# Altium PCB PCB.PcbDoc
Units mm, origin at the board's own origin, x right, y up, seen from the top; angles counter-clockwise.
Board outline 91 x 78.5 mm, 2 copper layers (Top Layer, Bottom Layer); 44 components, 40 nets, 189 pads, 50 vias.
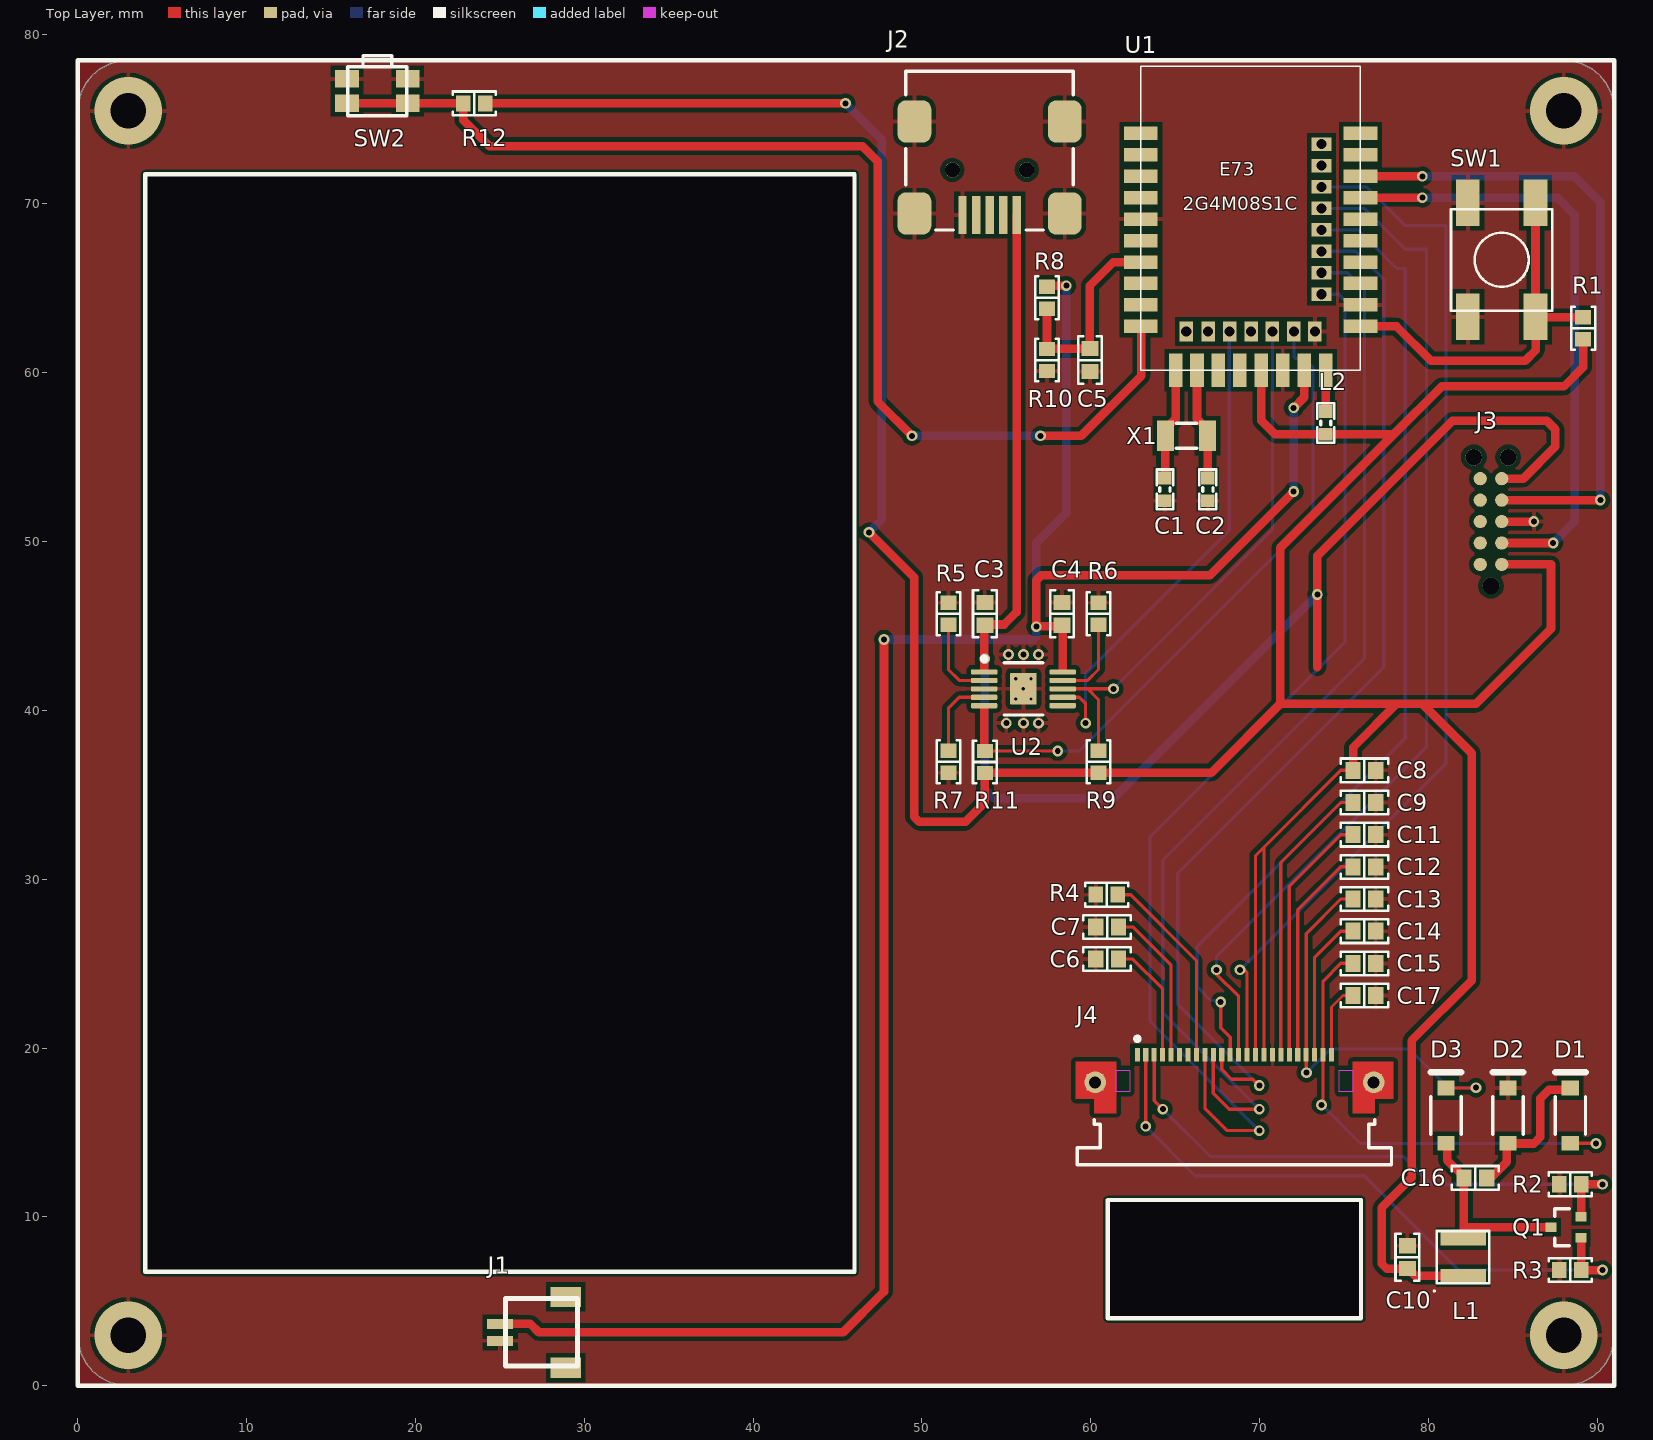
[diagram p0: Top Layer view]
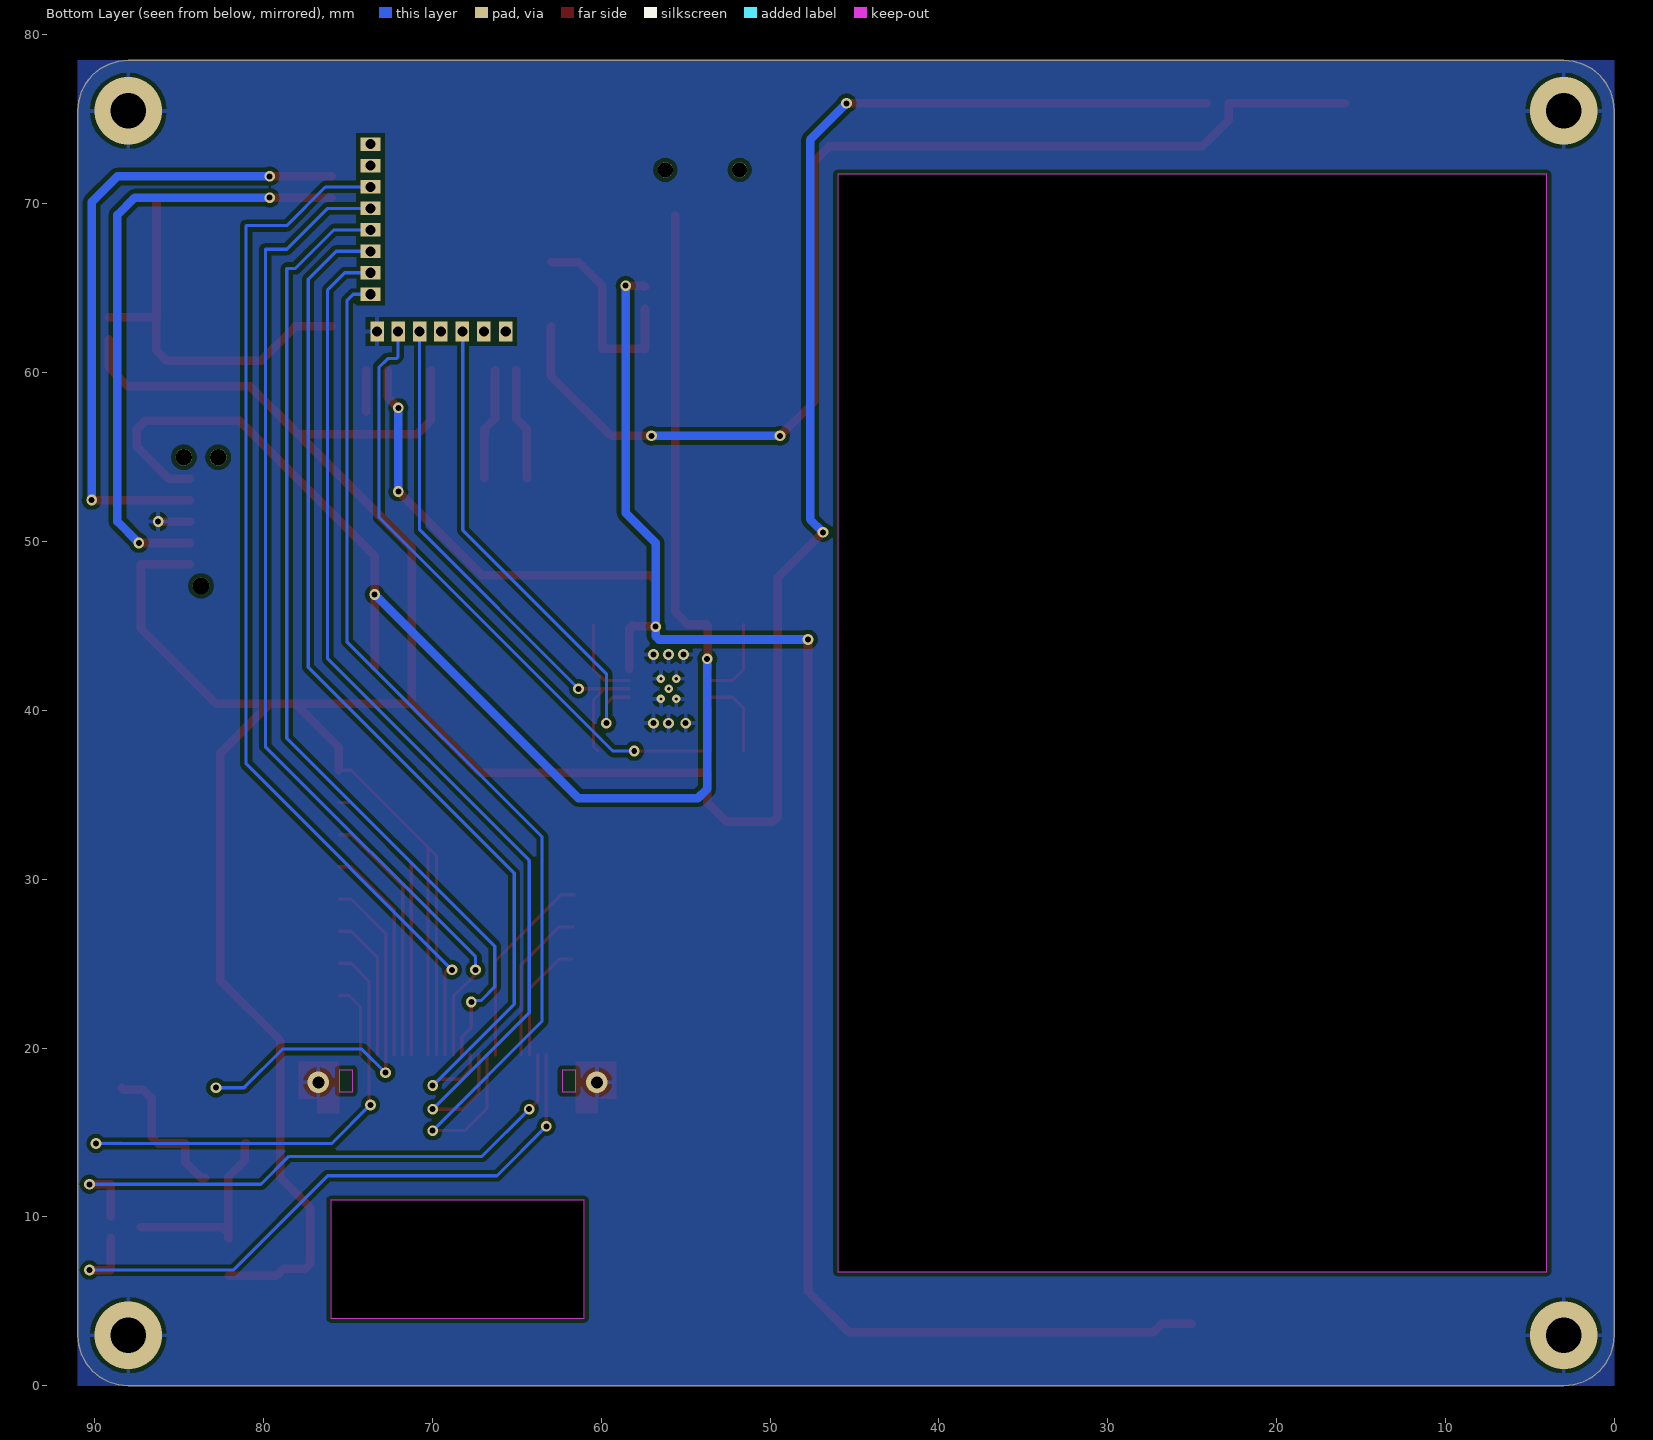
[diagram p1: Bottom Layer view, seen from below]
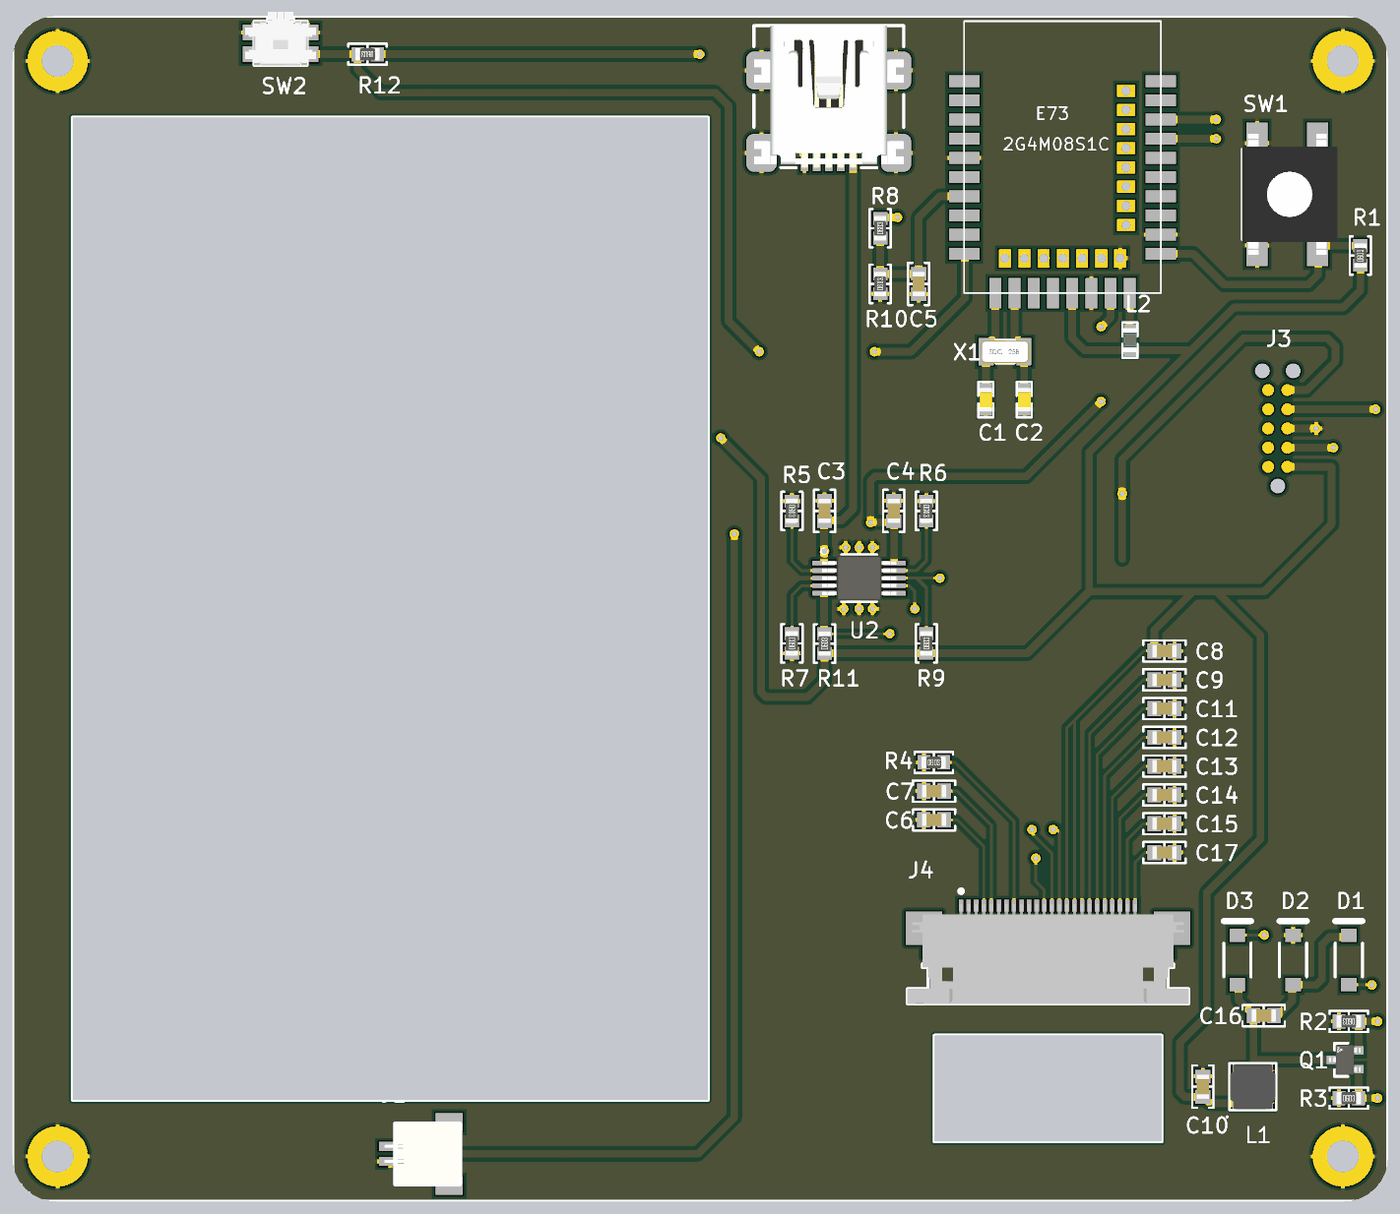
[diagram p2: 3D render of the assembled board from above, using the file's embedded part models]

## Layer stack, top to bottom
Top Solder: solder mask 0.0102, Solder Resist, Dk 3.5
Top Layer: signal copper 0.0356
Dielectric 1: dielectric 0.32, FR-4, Dk 4.8
Bottom Layer: signal copper 0.0356
Bottom Solder: solder mask 0.0102, Solder Resist, Dk 3.5

## Board outline
88,0 88.585,0.058 89.148,0.228 89.667,0.506 90.121,0.879 90.494,1.333 90.772,1.852 90.942,2.415 91,3 91,75.5 90.942,76.085 90.772,76.648 90.494,77.167 90.121,77.621 89.667,77.994 89.148,78.272 88.585,78.442 88,78.5 3,78.5 2.415,78.442 1.852,78.272 1.333,77.994 0.879,77.621 0.506,77.167 0.228,76.648 0.058,76.085 0,75.5 0,3 0.058,2.415 0.228,1.852 0.506,1.333 0.879,0.879 1.333,0.506 1.852,0.228 2.415,0.058 3,0
cut-out: 76,4 61,4 61,11 76,11
cut-out: 46,6.75 4,6.75 4,71.75 46,71.75

## Design rules (kind name [scope] priority, off if disabled: settings)
Clearance [All] p1: gap=0.254 ignorepadtopadclearanceinfootprint=FALSE except(0: Arc-Hole Track-Hole SMDPad-Hole THPad-Hole Via-Hole Fill-Hole Poly-Hole Region-Hole Text-Hole)
PolygonConnect [All] p1: connectstyle=Relief reliefconductorwidth=0.256 reliefentries=4 polygonreliefangle="90 Angle" airgapwidth=0.254
RoomDefinition Sheet1 [InComponentClass('Sheet1')] p1: confinementstyle=ConfineIn formatcopy=TRUE lockcomponents=FALSE outline 0,0 50.8,0 50.8,25.4 0,25.4
RoomDefinition Sheet [InComponentClass('Sheet')] p2: confinementstyle=ConfineIn formatcopy=TRUE lockcomponents=FALSE outline 0,0 50.8,0 50.8,25.4 0,25.4
RoutingVias [All] p1: holewidth=0.711 width=1.27 viastyle="Through Hole" minholewidth=0.355 minwidth=0.635 maxholewidth=0.711 maxwidth=1.27
SolderMaskExpansion [All] p1: expansion=0.102
Width [All] p1: maxlimit=0.508 minlimit=0.19 preferedwidth=0.254
30 further rules are at their usual default settings.

## Classes and differential pairs
component class Sheet1: C6 C7 C8 C9 C10 C11 C12 C13 C14 C15 C16 C17 D1 D2 D3 J4 L1 Q1 R2 R3 R4 R12 SW2
component class Sheet: C1 C2 C3 C4 C5 J1 J2 J3 L2 R1 R5 R6 R7 R8 R9 R10 R11 SW1 U1 U2 X1

## Components (designator, comment, footprint, x,y, rotation, side; value= is the part's Value field where it differs from the comment)
C1 "4.7µF" CAPC1608X06L 64.389,53.086 r90 top
C2 "4.7µF" CAPC1608X06L 66.929,53.086 r90 top
C3 "1µF" "CAP 0603_1608" 53.721,45.72 r270 top
C4 "1µF" "CAP 0603_1608" 58.293,45.72 r270 top
C5 "10000pF" "CAP 0603_1608" 59.944,60.746 r90 top
C6 "1µF" "CAP 0603_1608" 60.96,25.273 r0 top
C7 "1µF" "CAP 0603_1608" 60.96,27.178 r0 top
C8 "100nF" "CAP 0603_1608" 76.2,36.449 r180 top
C9 "1µF" "CAP 0603_1608" 76.2,34.544 r180 top
C10 "4.7µF" "CAP 0603_1608" 78.74,7.62 r270 top
C11 "1µF" "CAP 0603_1608" 76.2,32.639 r180 top
C12 "1µF" "CAP 0603_1608" 76.2,30.734 r180 top
C13 "1µF" "CAP 0603_1608" 76.2,28.829 r180 top
C14 "1µF" "CAP 0603_1608" 76.2,26.924 r180 top
C15 "1µF" "CAP 0603_1608" 76.2,25.019 r180 top
C16 "4.7µF" "CAP 0603_1608" 82.764,12.319 r180 top
C17 "1µF" "CAP 0603_1608" 76.2,23.114 r180 top
D1 "MBR0530" FAIR-SOD123-2_V 88.392,16.002 r90 top
D2 "MBR0530" FAIR-SOD123-2_V 84.709,16.002 r90 top
D3 "MBR0530" FAIR-SOD123-2_V 81.026,16.002 r90 top
J1 "HDR-2, 1mm" SM02B-SRSS-TB 25.019,3.167 r90 top
J2 "10033526-N3212LF" "FCI USB 10033526-N3212LF" 54,73.152 r0 top
J3 "TC2050-IDC" TC2050-IDC-NLFP 83.693,51.181 r90 top
J4 "52435-2471" MOLX-52435-2471 68.5,18.84 r0 top
L1 "2.2µH" TY-NR3015 82.042,7.62 r90 top
L2 "10µH" INDC1608X06L 73.914,57.023 r270 top
Q1 "SI1308EDL-T1-GE3" FP-S-03946-MFG 88.138,9.398 r180 top
R1 "10 kOhms" "RES 0603_1608" 89.154,62.626 r90 top
R2 "470 mOhms" "RES 0603_1608" 88.392,11.938 r180 top
R3 "10 kOhms" "RES 0603_1608" 88.392,6.858 r0 top
R4 "0 Ohms" "RES 0603_1608" 60.945,29.083 r0 top
R5 "1 kOhms" "RES 0603_1608" 51.562,45.72 r270 top
R6 "10 kOhms" "RES 0603_1608" 60.452,45.72 r270 top
R7 "2 kOhms" "RES 0603_1608" 51.562,36.957 r90 top
R8 "820 kOhms" "RES 0603_1608" 57.404,64.429 r90 top
R9 "10 kOhms" "RES 0603_1608" 60.452,36.957 r90 top
R10 "2 MOhms" "RES 0603_1608" 57.404,60.746 r90 top
R11 "10 kOhms" "RES 0603_1608" 53.721,36.942 r90 top
R12 "10 kOhms" "RES 0603_1608" 23.495,75.946 r180 top
SW1 "PB SW" Switch-PB-6.2x6.3mm-SMD 84.328,66.675 r270 top
SW2 "PTS840 GK SMTR LFS" EVQP7A/J/B/K 17.75,76.671 r180 top
U1 "E73-2G4M08S1C" E73-2G4M08S1C 62.976,60.154 r0 top
U2 "BQ24090DGQT" DGQ0010D_M 56.007,41.275 r0 top
X1 "32.768kHz" XTAL_3215 65.659,56.261 r0 top

## Footprints (in the part's own frame and the unit in brackets; to place one, negate y for a bottom-side part, rotate by r counter-clockwise, add the part's x,y. Pads: shape width x height; smd on the part's side, far side on the other; paste and mask are expansions set on the pad)
"CAP 0603_1608" [mm] "Chip Capacitor, 2-Leads, Body 1.60x0.80mm, IPC Medium Density"
  rect 0.9x1 smd: 1(-0.675,0) 2(0.675,0)
  silkscreen extent -1.4,-0.7 1.4,0.7, body extent -0.8,-0.41 0.8,0.41, height 0.82
CAPC1608X06L [mm]
  rect 0.75x0.8 smd: 1(-0.675,0) 2(0.675,0)
  silkscreen extent -1.17,-0.5 1.17,0.5, body extent -0.8,-0.43 0.8,0.43, height 0.8
DGQ0010D_M [mm] "TSOP, 10-Leads, Body 3.1x3.1mm, Pitch 0.5mm, Thermal Pad 1.88x1.57mm, IPC Low Density"
  rrect33% 1.55x0.3 smd: 1(-2.325,1) 2(-2.325,0.5) 3(-2.325,0) 4(-2.325,-0.5) 5(-2.325,-1) 6(2.325,-1) 7(2.325,-0.5) 8(2.325,0) 9(2.325,0.5) 10(2.325,1)
  rrect6% 1.57x1.88 smd: 11(0,0)
  silkscreen extent -2.45,-1.55 1.15,1.9, body extent -2.45,-1.5 2.45,1.5, height 0.94
E73-2G4M08S1C [mm]
  rect 2x0.8 smd: 1(-0.016,14.014) 2(-0.016,12.744) 3(-0.016,11.474) 4(-0.016,10.204) 5(-0.016,8.934) 6(-0.016,7.664) 7(-0.016,6.394) 8(-0.016,5.124) 9(-0.016,3.854) 10(-0.016,2.584) 26(12.984,2.584) 27(12.984,3.854) 29(12.984,5.124) 31(12.984,6.394) 33(12.984,7.664) 35(12.984,8.934) 37(12.984,10.204) 39(12.984,11.474) 41(12.984,12.744) 43(12.984,14.014)
  rect 0.8x2 smd: 11(2.039,-0.016) 13(3.309,-0.016) 15(4.579,-0.016) 17(5.849,-0.016) 19(7.119,-0.016) 21(8.389,-0.016) 23(9.659,-0.016) 25(10.929,-0.016)
  rect 0.8x1.2 hole 0.6: 12(2.674,2.284) 14(3.967,2.284) 16(5.237,2.284) 18(6.507,2.284) 20(7.777,2.284) 22(9.047,2.284) 24(10.294,2.284)
  rect 1.2x0.8 hole 0.6: 28(10.684,4.489) 30(10.684,5.759) 32(10.684,7.029) 34(10.684,8.299) 36(10.684,9.569) 38(10.684,10.839) 40(10.684,12.109) 42(10.684,13.379)
  silkscreen extent -0.02,-0.02 12.98,17.98
EVQP7A/J/B/K [mm]
  rect 1.4x1.05 smd: 1(-1.8,0.725) 1(1.8,0.725) 2(-1.8,-0.725) 2(1.8,-0.725)
  silkscreen extent -1.75,-2.1 1.75,1.45, body extent -2.35,-2.1 2.35,1.45, height 1.35
FAIR-SOD123-2_V [mm] "SOD123, 2-Leads, Body 1.80x2.85mm"
  rect 0.88x1.02 smd: 1(-1.635,0) 2(1.635,0)
  silkscreen extent -1.11,-0.9 2.58,0.9, body extent -1.43,-0.9 1.42,0.9, height 1.28
"FCI USB 10033526-N3212LF" [mm] "USB 2.0 Type B Mini"
  rect 0.5x2.25 smd: 1(1.6,-3.826) 2(0.8,-3.826) 3(0,-3.826) 4(-0.8,-3.826) 5(-1.6,-3.826)
  round 0.9 hole 0.9 unplated: M(-2.2,-1.151) M(2.2,-1.151)
  rrect50% 2x2.5 smd: S(-4.45,-3.731) S(-4.45,1.719) S(4.45,-3.731) S(4.45,1.719)
  silkscreen extent -4.95,-4.71 4.95,4.69, body extent -4.95,-4.7 4.95,4.7, height 4.01
FP-S-03946-MFG [mil]
  rect 26x22 smd paste+0 mask+0: 1(-35,24.5) 2(-35,-24.5) 3(35,0)
  silkscreen extent -7,-43 27,43, body extent -52,-47 52,47, height 10
INDC1608X06L [mm]
  rect 0.75x0.8 smd: 1(-0.675,0) 2(0.675,0)
  silkscreen extent -1.17,-0.5 1.17,0.5, body extent -0.8,-0.48 0.8,0.48, height 0.8
MOLX-52435-2471 [mm] "FPC Connector, 24-Leads, Right Angle, Pitch 0.5 mm, Mated Height 2.0 mm, SMT"
  rect 0.3x0.8 smd: 1(-5.75,0.762) 2(-5.25,0.762) 3(-4.75,0.762) 4(-4.25,0.762) 5(-3.75,0.762) 6(-3.25,0.762) 7(-2.75,0.762) 8(-2.25,0.762) 9(-1.75,0.762) 10(-1.25,0.762) 11(-0.75,0.762) 12(-0.25,0.762) 13(0.25,0.762) 14(0.75,0.762) 15(1.25,0.762) 16(1.75,0.762) 17(2.25,0.762) 18(2.75,0.762) 19(3.25,0.762) 20(3.75,0.762) 21(4.25,0.762) 22(4.75,0.762) 23(5.25,0.762) 24(5.75,0.762)
  rect 1x1 smd: MP1(-8.25,-0.863) MP2(8.25,-0.863)
  Top Layer region: -7,0.362 -9.4,0.362 -9.4,-1.838 -8.3,-1.838 -8.3,-2.688 -7,-2.688
  Top Layer region: 7,0.362 9.4,0.362 9.4,-1.838 8.3,-1.838 8.3,-2.688 7,-2.688
  Keep-Out Layer region: -7,-0.137 -6.2,-0.137 -6.2,-1.438 -7,-1.438
  Keep-Out Layer region: 6.2,-0.137 7,-0.137 7,-1.438 6.2,-1.438
  silkscreen extent -9.3,-5.74 9.3,1.84, body extent -9.3,-5.74 9.3,0.86, height 2.05
"RES 0603_1608" [mm] "Chip Resistor, 2-Leads, Body 1.60x0.80mm, IPC Medium Density"
  rect 0.85x0.95 smd: 1(-0.65,0) 2(0.65,0)
  silkscreen extent -1.27,-0.7 1.27,0.7, body extent -0.8,-0.4 0.8,0.4, height 0.45
SM02B-SRSS-TB [mm]
  rect 1.2x1.8 smd: 0(-2.1,-3.875) 0(2.1,-3.875)
  rect 0.6x1.55 smd: 1(-0.5,0) 2(0.5,0)
  silkscreen extent -2,-4.57 2,-0.33, body extent -1.99,-4.58 1.99,0.41, height 3
Switch-PB-6.2x6.3mm-SMD [mm]
  rect 2.75x1.4 smd: 1(-3.375,2) 1(3.375,2) 2(-3.375,-2) 2(3.375,-2)
  silkscreen extent -3,-3 3,3, body extent -4,-3 4,3.3, height 3.1
TC2050-IDC-NLFP [mil]
  round 39 hole 39 unplated: 0(-150,0) 0(150,-40) 0(150,40)
  round 31 smd paste-196.85: 1(-100,-25) 2(-50,-25) 3(0,-25) 4(50,-25) 5(100,-25) 6(100,25) 7(50,25) 8(0,25) 9(-50,25) 10(-100,25)
  Top Layer pour cut-out: -100,25 -100,-25 100,-25 100,25
TY-NR3015 [mm]
  rect 0.8x2.7 smd: 1(-1.1,0) 2(1.1,0)
  silkscreen extent -2.05,-1.55 1.55,1.75, body extent -1.5,-1.5 1.5,1.5, height 1.35
XTAL_3215 [mm]
  rect 1x1.8 smd: 1(-1.25,0) 2(1.25,0)
  silkscreen extent -0.6,-0.75 0.6,0.75, body extent -1.6,-0.75 1.6,0.75, height 0.81

## Part data
C1 C2: library part CAP_0603, "Capacitor, X7R, ±10%", Manufacturer=Samsung, Manufacturer Part Number=CL10B475KQ8NQNC, Part Number=C0603-4µ7-6.3V-X7R, Supplier part number=1276-2087-1-ND, Artikkelnr Noca=20039473, Artikkelnr Simpro=N.A., Datasheet=http://media.digikey.com/pdf/Data%20Sheets/Samsung%20PDFs/CL10B475KQ8NQNC_Spec.pdf, Footprint Doc=0603, LatestRevisionDate=2015-06-10, Note=6.3V, Pin Count=2, Published=2015-06-10, Publisher="Nordic Semiconductor", Supplier=Digi-Key
C3 C4: library part JMK107BJ105KK-T, "CAP CER 1UF 6.3V X5R 0603", Device Package="0603 (1608 Metric)", Manufacturer="Taiyo Yuden", Operating Temperature="-55°C ~ 85°C", Supplier Part Number 1=587-1993-1-ND, Temperature Coefficient=X5R, Tolerance=±10%, Voltage - Rated=6.3V, Applications="General Purpose", Capacitance=1µF, ComponentLink1Description=Datasheet, ComponentLink1URL=https://www.yuden.co.jp/productdata/catalog/mlcc01_e.pdf, ComponentLink2Description="DigiKey Link", ComponentLink2URL=http://digikey.com/product-detail/en/taiyo-yuden/JMK107BJ105KK-T/587-1993-1-ND/1646655, LastUpdated="21/01/2020 00:02:08", Lifecycle Status=Active, Minimum Order=1, Mounting Type="Surface Mount, MLCC", Package / Case="0603 (1608 Metric)", Packaging=TapeAndReel, PartId=2858, Part Number=JMK107BJ105KK-T, Part Status=Active, Price=0.02, Series=M, Size / Dimension="0.063\" L x 0.031\" W (1.60mm x 0.80mm)", Supplier 1=DigiKey, Thickness (Max)="0.020\" (0.50mm)"
C5: library part C0603C103K4RECAUTO, "CAP CER 0603 10NF 16V X7R 10%", Device Package="0603 (1608 Metric)", Manufacturer=KEMET, Operating Temperature="-55°C ~ 125°C", Ratings=AEC-Q200, Supplier Part Number 1=399-17880-1-ND, Temperature Coefficient=X7R, Tolerance=±10%, Voltage - Rated=16V, Applications="Automotive, ESD Protection", Capacitance=10000pF, ComponentLink1Description=Datasheet, ComponentLink1URL=https://api.kemet.com/component-edge/download/datasheet/C0603C103K4RECAUTO.pdf, ComponentLink2Description="DigiKey Link", ComponentLink2URL=http://digikey.com/product-detail/en/kemet/C0603C103K4RECAUTO/399-17880-1-ND/8640547, LastUpdated="21/01/2020 00:02:00", Lifecycle Status=Active, Minimum Order=1, Mounting Type="Surface Mount, MLCC", Package / Case="0603 (1608 Metric)", Packaging=TapeAndReel, PartId=8251, Part Number=C0603C103K4RECAUTO, Part Status=Active, Price=0.02, Series="ESD SMD Auto X7R", Size / Dimension="0.063\" L x 0.031\" W (1.60mm x 0.80mm)", Supplier 1=DigiKey, Thickness (Max)="0.034\" (0.87mm)"
C6 C7 C9 C11 C12 C13 C14 C15 C17: library part C0603C105K7PAC7867, "CAP CER 1UF 4V X5R 0603", Device Package="0603 (1608 Metric)", Manufacturer=KEMET, Operating Temperature="-55°C ~ 85°C", Supplier Part Number 1=399-14942-1-ND, Temperature Coefficient=X5R, Tolerance=±10%, Voltage - Rated=4V, Applications="General Purpose", Capacitance=1µF, ComponentLink1Description=Datasheet, ComponentLink1URL=https://api.kemet.com/component-edge/download/datasheet/C0603C105K7PAC7867.pdf, ComponentLink2Description="DigiKey Link", ComponentLink2URL=http://digikey.com/product-detail/en/kemet/C0603C105K7PAC7867/399-14942-1-ND/7382491, LastUpdated="21/01/2020 00:01:35", Lifecycle Status=Active, Minimum Order=1, Mounting Type="Surface Mount, MLCC", Package / Case="0603 (1608 Metric)", Packaging=TapeAndReel, PartId=18572, Part Number=C0603C105K7PAC7867, Part Status=Active, Price=0.03, Series="SMD Comm X5R", Size / Dimension="0.063\" L x 0.031\" W (1.60mm x 0.80mm)", Supplier 1=DigiKey, Thickness (Max)="0.035\" (0.90mm)"
C8: library part C0603C105K7PAC7867, "CAP CER 100nF 4V X5R 0603", Capacitance=1µF, Device Package="0603 (1608 Metric)", Manufacturer=KEMET, Operating Temperature="-55°C ~ 85°C", Supplier Part Number 1=399-14942-1-ND, Temperature Coefficient=X5R, Tolerance=±10%, Voltage - Rated=4V, Applications="General Purpose", ComponentLink1Description=Datasheet, ComponentLink1URL=https://api.kemet.com/component-edge/download/datasheet/C0603C105K7PAC7867.pdf, ComponentLink2Description="DigiKey Link", ComponentLink2URL=http://digikey.com/product-detail/en/kemet/C0603C105K7PAC7867/399-14942-1-ND/7382491, LastUpdated="21/01/2020 00:01:35", Lifecycle Status=Active, Minimum Order=1, Mounting Type="Surface Mount, MLCC", Package / Case="0603 (1608 Metric)", Packaging=TapeAndReel, PartId=18572, Part Number=C0603C105K7PAC7867, Part Status=Active, Price=0.03, Series="SMD Comm X5R", Size / Dimension="0.063\" L x 0.031\" W (1.60mm x 0.80mm)", Supplier 1=DigiKey, Thickness (Max)="0.035\" (0.90mm)"
C10 C16: library part LMK107BJ475KA-T, "CAP CER 4.7UF 10V X5R 0603", Device Package="0603 (1608 Metric)", Manufacturer="Taiyo Yuden", Operating Temperature="-55°C ~ 85°C", Supplier Part Number 1=587-1441-1-ND, Temperature Coefficient=X5R, Tolerance=±10%, Voltage - Rated=10V, Applications="General Purpose", Capacitance=4.7µF, ComponentLink1Description=Datasheet, ComponentLink1URL="https://ds.yuden.co.jp/TYCOMPAS/ut/detail?pn=LMK107BJ475KA-T  &u=M", ComponentLink2Description="DigiKey Link", ComponentLink2URL=http://digikey.com/product-detail/en/taiyo-yuden/LMK107BJ475KA-T/587-1441-1-ND/1004072, LastUpdated="21/01/2020 00:02:09", Lifecycle Status=Active, Minimum Order=1, Mounting Type="Surface Mount, MLCC", Package / Case="0603 (1608 Metric)", Packaging=TapeAndReel, PartId=2244, Part Number=LMK107BJ475KA-T, Part Status=Active, Price=0.03, Series=M, Size / Dimension="0.063\" L x 0.031\" W (1.60mm x 0.80mm)", Supplier 1=DigiKey, Thickness (Max)="0.035\" (0.90mm)"
D1 D2 D3: library part CMP-2000-05113-1, "Diode Schottky 30V 0.5A 2-Pin SOD-123 T/R", Capacitance @ Vr, F=-, Current - Average Rectified (Io)=500mA, Current - Reverse Leakage @ Vr=130µA@30V, Manufacturer=Fairchild, Operating Temperature - Junction=-65degC~125degC, Package / Case=SOD-123, Standard Package=1, Voltage - DC Reverse (Vr) (Max)=30V, Voltage - Forward (Vf) (Max) @ If=430mV@500mA, Category=DiscreteSemiconductorProducts, Datasheet URL=https://www.fairchildsemi.com/datasheets/MB/MBR0530.pdf, Datasheet Version="Rev. 1.1.0, 10/2014", Diode Type=Schottky, Family=Diodes,Rectifiers-Single, Manufacturer URL=https://www.fairchildsemi.com/, Mounting Type=SurfaceMount, Online Catalog=SchottkyDiode, Other Names=MBR0530CT, Packaging=CutTape(CT), Reverse Recovery Time (trr)=-, Series=-, Speed=FastRecovery=200mA(Io), Supplier Device Package=SOD-123
J1: library part SM02B-SRSS-TB, "1.0mm pitch connector side entry SMD", Manufacturer=JST, Manufacturer Part Number=SM02B-SRSS-TB(LF)(SN), Part number IPS=00000007791, Supplier part number=455-1802-1-ND, Artikkelnr Noca=55010030, Artikkelnr Simpro=N.A., Datasheet=http://www.jst-mfg.com/product/pdf/eng/eSH.pdf, Footprint Doc=SM02B-SRSS-TB, LatestRevisionDate=2016-06-20, Note="JST, Header", Part Number=SM02B-SRSS-TB, Pin Count=2, Published=2016-06-20, Publisher="Nordic Semiconductor", Supplier=Digi-Key
J2: "CONN RCPT MINI USB B 5POS SMD RA", Current Rating (Amps)="1A per Contact", Manufacturer="Amphenol ICC (FCI)", Operating Temperature="-25°C ~ 85°C", Supplier Part Number 1=609-4700-2-ND, Voltage - Rated=30V, ComponentLink1Description=Datasheet, ComponentLink1URL=http://www.amphenol-icc.com/media/wysiwyg/files/drawing/10033526.pdf, ComponentLink2Description="DigiKey Link", ComponentLink2URL=//digikey.com/product-detail/en/amphenol-icc-fci/10033526-N3212LF/609-4700-2-ND/4292074, Connector Type="USB - mini B", Features="Board Guide, Solder Retention", Gender=Receptacle, LastUpdated="09/12/2019 20:52:14", Lifecycle Status=0, Mating Cycles=5000, Minimum Order=1, Mounting Feature=Horizontal, Mounting Type="Surface Mount, Right Angle", Number of Contacts=5, Number of Ports=1, Packaging=TapeAndReel, Part Number=10033526-N3212LF, Part Status=Active, Price=0.39, Series=-, Shielding=Shielded, Supplier 1=DigiKey, Termination=Solder
J3: "CBL PLUG-OF-NAILS 10-PIN", Manufacturer="Tag-Connect LLC", Manufacturer Part Number=TC2050-IDC-NLFP, Supplier part number=TC2050-IDC-NL-ND, Artikkelnr Noca=N.A., Artikkelnr Simpro=N.A., ComponentLink1Description=Datasheet, ComponentLink2Description="Supplier link", Footprint Doc=TC2050-IDC-NLFP, HelpURL=http://www.tag-connect.com/Materials/TC2050-IDC%20Datasheet.pdf, LatestRevisionDate=2012-11-21, Part Number=TC2050-IDC-NLFP, Pin Count=10, Published=2012-11-21, Publisher="Nordic Semiconductor", Supplier=Digi-Key
J4: library part CMP-1241-00275-1, "0.5 mm Pitch Easy-On(TM) Type FPC Connector, 2.0 mm Mated Height, Right Angle, ZIF, SMT, Top Contact, 24 Circuits, -40 to 85 degC, ELV and RoHS Compliant, Tape and Reel", Current (Max per Contact)=0.5A, Manufacturer=Molex, Voltage (Max)="50V AC (RMS)/DC", Circuits (Loaded)=24, ComponentLink1Description="Manufacturer URL", ComponentLink1URL=http://www.molex.com/molex/index.jsp, ComponentLink2Description=Datasheet, ComponentLink2URL=http://www.molex.com/webdocs/datasheets/pdf/en-us/0524352471_FFC_FPC_CONNECTORS.pdf, ComponentLink3Description="Package Specification", ComponentLink3URL=http://www.molex.com/pdm_docs/sd/524352471_sd.pdf, Contact Position=Top, Durability (mating cycles max)=20, Entry Angle="90degrees Angle", Mated Height=2.00mm, Material - Metal="Phosphor Bronze", Material - Plating Mating=Gold, Material - Plating Termination=Gold, Mounting Technology="Surface Mount", Number of Rows=1, Orientation="Right Angle", PackageDescription="24-Lead FPC Connector, Pitch 0.5 mm", PackageReference=52435-2471, PackageVersion="Rev. D, 07/2010", Packing="Tape and Reel", PartNumber=52435-2471, PCB Locator=No, PCB Retention=Yes, Pitch - Mating Interface=0.50mm, Polarized to PCB=Yes, RoHS=TRUE, Stackable=No
L1: library part IND_1212, "Ferrite Inductor, Shielded, 1,5A, 72mOhm", 2nd source part number=188-5853, Manufacturer="Taiyo Yuden", Manufacturer Part Number=NR3015T2R2M, Part Number=NR3015-2µ2-1.5A-72mOhm, Supplier part number=587-1648-1-ND, 2nd source Supplier=Farnell, Artikkelnr Noca=33029487, Artikkelnr Simpro=N.A., ComponentLink1Description=Datasheet, ComponentLink2Description="Supplier link", Datasheet=http://www.yuden.co.jp/ut/product/category/inductor/NR3015T2R2M.pdf, Footprint Doc=1212, LatestRevisionDate=2014-01-22, Pin Count=2, Published=2014-01-22, Publisher="Nordic Semiconductor", Supplier=Digi-Key
L2: library part IND_0603, "Inductor, 80mA, ±10%", 2nd source part number=178-6105, Manufacturer="Taiyo Yuden", Manufacturer Part Number=LBMF1608T100K, Part Number=L0603-10µ, Part number IPS=00000007794, Supplier part number=587-1714-1-ND, 2nd source Supplier=Farnell, Artikkelnr Noca=33029314, Artikkelnr Simpro=N.A., ComponentLink1Description=Datasheet, ComponentLink2Description="Supplier link", Footprint Doc=0603, HelpURL=http://www.yuden.co.jp/ut/product/pdf/elb2_e.pdf, LatestRevisionDate=2012-09-19, Note="LBMF1608T100K 10µH 80mA 0603", Pin Count=2, Published=2010-02-24, Publisher="Nordic Semiconductor", Supplier=Digi-Key
Q1: library part CMP-02550-000099-1, "MOSFET N-CH 30V 1.4A SC-70-3", Continuous Drain Current=1.5A, Drain To Source Breakdown Voltage=30V, Drain To Source Resistance=0.11O, Gate To Source Voltage=12V, Input Capacitace At Vds="105pF @ 15V", Manufacturer=Vishay, Max Forward Diode Voltage=1.2V, Max Junction Temp=+150°C, Package=S-03946, Power Dissipation=0.4W, Pulse Drain Current=6A, Temperature="-55°C to +150°C", Temperature Range Low=-55°C, Typ Forward Diode Voltage=0.8V, Automotive=No, Category=Trans, ComponentLink2Description=Datasheet, ComponentLink2URL=http://www.vishay.com/docs/63399/si1308edl.pdf, Depletion Mode=False, Device Class L1="Discrete Semiconductors", Device Class L2=Transistors, Device Class L3=MOSFETs, Digikey Description="MOSFET N-CH 30V 1.4A SC-70-3", Drain To Source Voltage=30V, Gate Charge At Vgs="2.7nC @ 10V", Height=1.1mm, Ipc Land Pattern Name=SOT65P210X100-3, Lead Free=Yes, Manufacturer Part Number=SI1308EDL-T1-GE3, Mouser Description="MOSFET 30V 1.5A", Number Of Channels=1, Number Of N Channels=1, Octopart=https://octopart.com/si1308edl-t1-ge3-vishay-45284459, Reverse Recovery Charge=3nC, Reverse Recovery Time=8ns, RoHS=TRUE, Rthja Max=250°C/W, Temperature Range High=+150°C, Threshold Vgs Max=1.5V, Threshold Vgs Min=0.6V, Transconductance=5S, Turn Off Delay Time=8ns, Turn On Delay Time=2ns
R1 R3 R6 R9 R11 R12: library part RNCS0603BKE10K0, "RES 10K OHM 0.1% 1/16W 0603", Device Package="0603 (1608 Metric)", Manufacturer="Stackpole Electronics Inc", Operating Temperature="-55°C ~ 155°C", Power (Watts)="0.063W, 1/16W", Ratings=AEC-Q200, Supplier Device Package=0603, Supplier Part Number 1=RNCS0603BKE10K0CT-ND, Temperature Coefficient=±25ppm/°C, Tolerance=±0.1%, ComponentLink1Description=Datasheet, ComponentLink1URL=https://www.seielect.com/catalog/sei-rncs_rnch.pdf, ComponentLink2Description="DigiKey Link", ComponentLink2URL=http://digikey.com/product-detail/en/stackpole-electronics-inc/RNCS0603BKE10K0/RNCS0603BKE10K0CT-ND/1800113, Composition="Thin Film", Features="Anti-Corrosive, Automotive AEC-Q200, Moisture Resistant", Height - Seated (Max)="0.022\" (0.55mm)", LastUpdated="21/01/2020 00:25:01", Lifecycle Status=Active, Minimum Order=1, Number of Terminations=2, Package / Case="0603 (1608 Metric)", Packaging=TapeAndReel, PartId=4838, Part Number=RNCS0603BKE10K0, Part Status=Active, Price=0.08, Resistance="10 kOhms", Series=RNCS, Size / Dimension="0.061\" L x 0.031\" W (1.55mm x 0.80mm)", Supplier 1=DigiKey
R2: library part RCWE0603R470FKEA, "RES 0.47 OHM 1% 1/5W 0603", Device Package="0603 (1608 Metric)", Manufacturer="Vishay Dale", Operating Temperature="-55°C ~ 155°C", Power (Watts)="0.2W, 1/5W", Ratings=AEC-Q200, Supplier Device Package=0603, Supplier Part Number 1=RCWE.47CCT-ND, Temperature Coefficient=±100ppm/°C, Tolerance=±1%, ComponentLink1Description=Datasheet, ComponentLink1URL=http://www.vishay.com/docs/20019/rcwe.pdf, ComponentLink2Description="DigiKey Link", ComponentLink2URL=http://digikey.com/product-detail/en/vishay-dale/RCWE0603R470FKEA/RCWE.47CCT-ND/2276694, Composition="Thick Film", Features="Automotive AEC-Q200, Current Sense, Moisture Resistant", Height - Seated (Max)="0.024\" (0.60mm)", LastUpdated="21/01/2020 00:22:42", Lifecycle Status=Active, Minimum Order=1, Number of Terminations=2, Package / Case="0603 (1608 Metric)", Packaging=TapeAndReel, PartId=10575, Part Number=RCWE0603R470FKEA, Part Status=Active, Price=0.17, Resistance="470 mOhms", Series=RCWE, Size / Dimension="0.063\" L x 0.033\" W (1.60mm x 0.85mm)", Supplier 1=DigiKey
R4: library part CRCW06030000Z0EAHP, "RES SMD 0 OHM JUMPER 1/4W 0603", Device Package="0603 (1608 Metric)", Manufacturer="Vishay Dale", Operating Temperature="-55°C ~ 155°C", Power (Watts)="0.25W, 1/4W", Ratings=AEC-Q200, Supplier Device Package=0603, Supplier Part Number 1=541-0.0SBCT-ND, Tolerance=Jumper, ComponentLink1Description=Datasheet, ComponentLink1URL=http://www.vishay.com/docs/20043/crcwhpe3.pdf, ComponentLink2Description="DigiKey Link", ComponentLink2URL=http://digikey.com/product-detail/en/vishay-dale/CRCW06030000Z0EAHP/541-0.0SBCT-ND/2222749, Composition="Thick Film", Features="Automotive AEC-Q200, Pulse Withstanding", Height - Seated (Max)="0.022\" (0.55mm)", LastUpdated="21/01/2020 00:24:44", Lifecycle Status=Active, Minimum Order=1, Number of Terminations=2, Package / Case="0603 (1608 Metric)", Packaging=TapeAndReel, PartId=5474, Part Number=CRCW06030000Z0EAHP, Part Status=Active, Price=0.02, Resistance="0 Ohms", Series=CRCW-HP, Size / Dimension="0.063\" L x 0.033\" W (1.60mm x 0.85mm)", Supplier 1=DigiKey
R5: library part CPF0603B1K0E, "RES SMD 1K OHM 0.1% 1/16W 0603", Device Package="0603 (1608 Metric)", Manufacturer="TE Connectivity Passive Product", Operating Temperature="-55°C ~ 155°C", Power (Watts)="0.063W, 1/16W", Supplier Device Package=0603, Supplier Part Number 1=A119887CT-ND, Temperature Coefficient=±25ppm/°C, Tolerance=±0.1%, ComponentLink1Description=Datasheet, ComponentLink1URL=https://www.te.com/commerce/DocumentDelivery/DDEController?Action=srchrtrv&DocNm=1773200&DocType=DS&DocLang=English, ComponentLink2Description="DigiKey Link", ComponentLink2URL=http://digikey.com/product-detail/en/te-connectivity-passive-product/CPF0603B1K0E/A119887CT-ND/4966485, Composition="Thin Film", Height - Seated (Max)="0.022\" (0.55mm)", LastUpdated="21/01/2020 00:24:55", Lifecycle Status=Active, Minimum Order=1, Number of Terminations=2, Package / Case="0603 (1608 Metric)", Packaging=TapeAndReel, PartId=4877, Part Number=CPF0603B1K0E, Part Status=Active, Price=0.09, Resistance="1 kOhms", Series="CPF, Neohm", Size / Dimension="0.061\" L x 0.031\" W (1.55mm x 0.80mm)", Supplier 1=DigiKey
R7: library part RT0603BRD072KL, "RES SMD 2K OHM 0.1% 1/10W 0603", Device Package="0603 (1608 Metric)", Manufacturer=Yageo, Operating Temperature="-55°C ~ 155°C", Power (Watts)="0.1W, 1/10W", Supplier Device Package=0603, Supplier Part Number 1=YAG1626CT-ND, Temperature Coefficient=±25ppm/°C, Tolerance=±0.1%, ComponentLink1Description=Datasheet, ComponentLink1URL=https://www.yageo.com/upload/media/product/productsearch/datasheet/rchip/PYu-RT_1-to-0.01_RoHS_L_11.pdf, ComponentLink2Description="DigiKey Link", ComponentLink2URL=http://digikey.com/product-detail/en/yageo/RT0603BRD072KL/YAG1626CT-ND/5139074, Composition="Thin Film", Height - Seated (Max)="0.022\" (0.55mm)", LastUpdated="21/01/2020 00:24:44", Lifecycle Status=Active, Minimum Order=1, Number of Terminations=2, Package / Case="0603 (1608 Metric)", Packaging=TapeAndReel, PartId=5635, Part Number=RT0603BRD072KL, Part Status=Active, Price=0.04, Resistance="2 kOhms", Series=RT, Size / Dimension="0.063\" L x 0.031\" W (1.60mm x 0.80mm)", Supplier 1=DigiKey
R8: library part CRGP0603F820K, "CRGP 0603 820K 1%", Device Package="0603 (1608 Metric)", Manufacturer="TE Connectivity Passive Product", Operating Temperature="-55°C ~ 155°C", Power (Watts)="0.25W, 1/4W", Supplier Device Package=0603, Supplier Part Number 1=A130451CT-ND, Temperature Coefficient=±100ppm/°C, Tolerance=±1%, ComponentLink1Description=Datasheet, ComponentLink1URL=https://www.te.com/commerce/DocumentDelivery/DDEController?Action=srchrtrv&DocNm=9-1773463-9&DocType=DS&DocLang=English, ComponentLink2Description="DigiKey Link", ComponentLink2URL=http://digikey.com/product-detail/en/te-connectivity-passive-product/CRGP0603F820K/A130451CT-ND/8578283, Composition="Thick Film", Features="Pulse Withstanding", Height - Seated (Max)="0.022\" (0.55mm)", LastUpdated="21/01/2020 00:24:55", Lifecycle Status=Active, Minimum Order=1, Number of Terminations=2, Package / Case="0603 (1608 Metric)", Packaging=TapeAndReel, PartId=5029, Part Number=CRGP0603F820K, Part Status=Active, Price=0.02, Resistance="820 kOhms", Series=CRGP, Size / Dimension="0.063\" L x 0.031\" W (1.60mm x 0.80mm)", Supplier 1=DigiKey
R10: library part RMCF0603FT2M00, "RES 2M OHM 1% 1/10W 0603", Device Package="0603 (1608 Metric)", Manufacturer="Stackpole Electronics Inc", Operating Temperature="-55°C ~ 155°C", Power (Watts)="0.1W, 1/10W", Ratings=AEC-Q200, Supplier Device Package=0603, Supplier Part Number 1=RMCF0603FT2M00CT-ND, Temperature Coefficient=±200ppm/°C, Tolerance=±1%, ComponentLink1Description=Datasheet, ComponentLink1URL=https://www.seielect.com/catalog/sei-rmcf_rmcp.pdf, ComponentLink2Description="DigiKey Link", ComponentLink2URL=http://digikey.com/product-detail/en/stackpole-electronics-inc/RMCF0603FT2M00/RMCF0603FT2M00CT-ND/1943145, Composition="Thick Film", Features="Automotive AEC-Q200", Height - Seated (Max)="0.022\" (0.55mm)", LastUpdated="21/01/2020 00:24:27", Lifecycle Status=Active, Minimum Order=1, Number of Terminations=2, Package / Case="0603 (1608 Metric)", Packaging=CutTape, PartId=6213, Part Number=RMCF0603FT2M00, Part Status=Active, Price=0.10, Resistance="2 MOhms", Series=RMCF, Size / Dimension="0.061\" L x 0.031\" W (1.55mm x 0.80mm)", Supplier 1=DigiKey
SW1: library part Switch-PB-6.2x6.3mm-SMD, "Tactile Switch, SPNO, SMD, 160gf, 6.2x6.3x2.5mm", 2nd source part number=688-SKHUALE010, Manufacturer=Dailywell, Manufacturer Part Number=TS604VM1-025BR-R, Part number IPS=00000007812, 2nd source Supplier=Mouser, Artikkelnr Noca=50019106, Artikkelnr Simpro=N.A., Datasheet=\\hizz\pro\app9717\Datasheet\switches\Dailywell\TS604VM1-025BR-R.pdf, Footprint Doc=Switch-PB-6.2x6.3mm-SMD, LatestRevisionDate=2016-04-21, Part Number=Switch-PB-6.2x6.3mm-SMD, Pin Count=4, Published=2010-02-01, Publisher="Nordic Semiconductor", Supplier=Cabcon, Supplier part number=TS604VM1-025BR-R
SW2: "Microminiature SMT Switch, Side Actuated", 2nd source part number=611-PTS840GKSMTR, Manufacturer="C&K Components", Part number IPS=00000001260, Supplier part number=CKN10508CT-ND, 2nd source Supplier=Mouser, Artikkelnr Noca=50019089, Artikkelnr Simpro=N.A., ComponentLink1Description=Datasheet, ComponentLink2Description="Supplier link", Footprint Doc="PTS840 Gx", HelpURL=http://www.ck-components.com/80185/pts840_11june13.pdf/, LatestRevisionDate=2017-11-09, Manufacturer Part Number="PTS840 GK SMTR LFS", Note="Tactile Switch, SPST, SMD, 220gf", Part Number="PTS840 GK SMTR LFS", Pin Count=4, Published=2014-08-12, Publisher="Nordic Semiconductor", Supplier=Digi-Key
U2: library part CMP-0321-00918-2, "1 A, Single Input, Single Cell Li-Ion Battery Charger with 10 K ohm NTC, 4.5 V, -40 to 150 degC, 10-pin MSOP-PowerPAD (DGQ), Green (RoHS & no Sb/Br)", Manufacturer="Texas Instruments", Over Voltage Protection=N, Code_JEDEC=MO-187-BA-T, ComponentLink1Description=Datasheet, ComponentLink1URL=http://www.ti.com/general/docs/lit/getliterature.tsp?genericPartNumber=BQ24090&fileType=pdf, DatasheetVersion=SLUS968C, Eco-Plan="Green (RoHS & no Sb/Br)", Lead Acid=N, Li-Ion=N, Li-Polymer=N, Mounting Technology="Surface Mount", NiCd=N, NiMH=N, PackageDescription="10-Pin PowerPAD Plastic Small Outline 0.5 mm Pitch, Exposed Pad", PackageReference=DGQ0010D, PackageVersion="revF, Nov-2011", PartNumber=BQ24090DGQT, SubFamily="Battery Charge Management", Vin(Min)(V)=4.5
X1: library part XTAL_SMD3215, "XTAL SMD 2012, 32.768kHz, 9pF, ±20ppm", Manufacturer=NDK, Manufacturer Part Number=NX3215SA-32.768K-STD-MUA-9, Part Number=XTAL_SMD3215_32.768kHz_9pF_NDK, Artikkelnr Noca=N.A., Artikkelnr Simpro=N.A., Footprint Doc=XTAL_3215, LatestRevisionDate=2017-10-23, Note="XTAL SMD 32.768kHz", Pin Count=2, Published=2017-10-23, Publisher="Nordic Semiconductor"

## Via types
v1: diameter 0.635, hole 0.355, Top Layer to Bottom Layer, 39 vias
v2: diameter 0.5, hole 0.2, Top Layer to Bottom Layer, 5 vias
v3: diameter 4, hole 2.1, Top Layer to Bottom Layer, 4 vias
v4: diameter 1.27, hole 0.711, Top Layer to Bottom Layer, 2 vias

## Nets (pads, with @x,y where several pads share a name; then routed paths per layer and width w, separated by ;. In a path a pad name is that pad's centre, name@x,y a point inside that pad or via, vN(x,y) a via of type N, cw(c..) or ccw(c..) an arc to the next point about the centre after c; other vN are vias at no path point)
BUSY: J4.9 U1.28 | length 65.1
  Top Layer w0.19: J4.9 66.75,16.435 68.072,15.113 v1(69.977,15.113)
  Bottom Layer w0.19: v1(69.977,15.113) 63.5,21.59 63.5,32.512 75.057,44.069 75.057,64.262 74.676,64.643 U1.28
CHG: R9.2 U1.20 U2.8 | length 32.1
  Top Layer w0.19: U2.8 59.817,41.275 ; R9.2@60.198,37.607 60.452,37.861 60.452,40.64 59.817,41.275 ; v1(61.341,41.275) 59.817,41.275
  Bottom Layer w0.19: v1(61.341,41.275) 70.753,50.687 U1.20
CLK: J4.13 U1.36 | length 60.6
  Top Layer w0.19: v1(67.437,24.638) 67.437,24.384 68.75,23.071 J4.13
  Bottom Layer w0.19: v1(67.437,24.638) 67.437,25.4 79.883,37.846 79.883,67.31 78.613,67.31 76.2,69.723 U1.36
CS: J4.12 U1.34 | length 58.7
  Top Layer w0.19: v1(67.691,22.733) 67.691,21.21 68.251,20.65 68.251,19.603 J4.12
  Bottom Layer w0.19: v1(67.691,22.733) 67.606,22.818 67.098,22.818 66.294,23.622 66.294,26.035 78.613,38.354 78.613,66.167 78.105,66.167 75.819,68.453 U1.34
D+: U1.31
D-: U1.29
DC: J4.11 U1.32 | length 62.7
  Top Layer w0.19: J4.11 67.75,18.737 68.326,18.161 69.596,18.161 v1(69.977,17.78)
  Bottom Layer w0.19: v1(69.977,17.78) 65.151,22.606 65.151,30.353 77.343,42.545 77.343,65.532 75.692,67.183 U1.32
DIN: J4.14 U1.38 | length 62.8
  Top Layer w0.19: v1(68.834,24.638) 69.088,24.638 69.25,24.476 J4.14
  Bottom Layer w0.19: v1(68.834,24.638) 81.026,36.83 81.026,68.707 78.613,68.707 76.327,70.993 U1.38
GDR: J4.2 Q1.1 R3.2 | length 38
  Top Layer w0.19: v1(63.246,15.367) 63.249,15.37 63.249,19.601 J4.2
  Top Layer w0.508: Q1.1 89.034,8.768 89.034,6.866 R3.2 v1(90.297,6.858)
  Bottom Layer w0.19: v1(63.246,15.367) 66.167,12.446 76.2,12.446 81.788,6.858 v1(90.297,6.858)
GND: C1.1 C2.1 C3.1 C4.1 C5.1 C6.1 C7.1 C8.1 C9.1 C10.1 C11.1 C12.1 C13.1 C14.1 C15.1 C17.1 D2.2 J1.1 J2.5 J2.S J3.3 J4.17 J4.MP1 J4.MP2 R2.2 R3.1 R4.1 R5.1 R6.1 R7.1 R10.1 SW1.2 SW2.2 U1.5 U1.21 U1.24 U1.27 U2.3 U2.11 | length 1.9
  Top Layer w0.508: J3.3 v1(86.233,51.181)
  other v1: 54.991,39.243 56.007,39.243 56.896,39.243 55.118,43.307 56.007,43.307 56.896,43.307
  other v2: 55.557,40.675 56.457,40.675 56.007,41.275 55.557,41.875 56.457,41.875
  other v3: 3,3 88,3 3,75.5 88,75.5
  other v4: 60.25,17.977 76.75,17.977
ISET2: U1.16 U2.7 | length 29.4
  Top Layer w0.19: v1(59.69,39.243) 59.69,40.386 59.302,40.774 U2.7@58.333,40.774 ; U2.7 U2.7@58.333,40.774
  Bottom Layer w0.19: v1(59.69,39.243) 59.69,42.164 68.199,50.673 68.199,62.424 U1.16
NetC1_2: C1.2 U1.11 X1.1 | length 6.6
  Top Layer w0.508: C1.2 64.399,53.771 64.399,56.651 65.015,57.267 U1.11
NetC2_2: C2.2 U1.13 X1.2 | length 6.6
  Top Layer w0.508: U1.13 66.285,57.285 66.909,56.661 X1.2 66.919,56.251 66.919,53.771 C2.2
NetC6_2: C6.2 J4.4 | length 7.2
  Top Layer w0.19: C6.2@61.722,25.273 62.484,25.273 64.25,23.507 J4.4
NetC7_2: C7.2 J4.5 | length 9.4
  Top Layer w0.19: C7.2 62.484,27.178 64.75,24.912 J4.5
NetC9_2: C9.2 J4.18 | length 17.1
  Top Layer w0.19: J4.18 71.25,30.991 74.803,34.544 C9.2
NetC11_2: C11.2 J4.19 | length 15
  Top Layer w0.19: J4.19 71.75,29.586 74.803,32.639 C11.2
NetC12_2: C12.2 J4.20 | length 12.9
  Top Layer w0.19: J4.20 72.25,28.181 74.803,30.734 C12.2
NetC14_2: C14.2 J4.22 | length 8.7
  Top Layer w0.19: J4.22 73.25,25.371 74.803,26.924 C14.2
NetC16_1: C16.1 D1.2 D2.1 | length 9.2
  Top Layer w0.508: C16.1 83.693,12.319 84.639,13.265 84.639,14.367 D2.1 84.725,14.351 86.233,14.351 86.614,14.732 86.614,17.018 87.12,17.524 88.279,17.524 D1.2
NetC16_2: C16.2 D3.1 L1.2 Q1.3 | length 11.4
  Top Layer w0.508: D3.1 81.096,14.367 81.096,13.362 82.089,12.369 C16.2 L1.2@82.089,9.064 ; L1.2 82.089,8.767 L1.2@82.089,9.064 ; Q1.3 82.423,9.398 L1.2@82.089,9.064
NetC17_2: C17.2 J4.24 | length 4.4
  Top Layer w0.19: J4.24 74.25,22.434 74.93,23.114 C17.2
NetJ4_8: J4.8 R4.2 | length 11.9
  Top Layer w0.19: R4.2 62.357,29.083 66.25,25.19 J4.8
NetL2_1: L2.1 U1.25 | length 2.4
  Top Layer w0.508: U1.25 73.91,60.133 73.91,57.702 L2.1
NetR5_2: R5.2 U2.2 | length 5
  Top Layer w0.19: R5.2 51.562,42.418 52.204,41.776 U2.2@53.681,41.776 ; U2.2@53.681,41.776 U2.2
NetR6_2: R6.2 U2.9 | length 5
  Top Layer w0.19: U2.9 59.809,41.775 60.452,42.418 R6.2
NetR7_2: R7.2 U2.4 | length 4.9
  Top Layer w0.19: R7.2 51.562,40.132 52.205,40.775 U2.4
PG: R11.2 U1.22 U2.5 | length 39.5
  Top Layer w0.19: R11.2 v1(58.039,37.592)
  Top Layer w0.508: 53.682,40.117 53.682,37.631 R11.2
  Bottom Layer w0.19: v1(58.039,37.592) 59.309,37.592 73.152,51.435 73.152,60.325 72.644,60.833 72.136,60.833 72.023,60.946 U1.22
PREVGH: C13.2 D3.2 J4.21 | length 25.5
  Top Layer w0.19: v1(72.771,18.542) 72.751,18.562 J4.21 J4.21 72.75,26.776 74.803,28.829 C13.2 ; D3.2 82.915,17.637 82.931,17.653 v1(82.804,17.653)
  Bottom Layer w0.19: v1(72.771,18.542) 74.168,19.939 78.867,19.939 81.153,17.653 v1(82.804,17.653)
PREVGL: C15.2 D1.1 J4.23 | length 28.3
  Top Layer w0.19: v1(73.66,16.637) 73.66,16.757 73.75,16.847 J4.23 73.75,23.966 74.803,25.019 C15.2 ; D1.1 89.9,14.367 v1(89.916,14.351)
  Bottom Layer w0.19: v1(73.66,16.637) 75.946,14.351 v1(89.916,14.351)
RESE: J4.3 Q1.2 R2.1 | length 34.5
  Top Layer w0.19: J4.3 63.75,16.895 v1(64.262,16.383)
  Top Layer w0.508: Q1.2 89.035,10.028 89.035,11.93 R2.1 v1(90.297,11.938)
  Bottom Layer w0.19: v1(64.262,16.383) 67.056,13.589 78.489,13.589 80.14,11.938 v1(90.297,11.938)
RST_E_PAPER: J4.10 U1.30 | length 64.2
  Top Layer w0.19: J4.10 67.25,17.332 68.199,16.383 v1(69.977,16.383)
  Bottom Layer w0.19: v1(69.977,16.383) 64.262,22.098 64.262,31.115 76.2,43.053 76.2,64.897 75.184,65.913 U1.30
RST_nRF: R1.2 SW1.1 U1.26 | length 23
  Top Layer w0.508: U1.26 78.105,62.738 80.137,60.706 85.725,60.706 86.352,61.333 SW1.1@86.352,63.276 ; SW1.1@86.328,70.05 86.328,63.3 SW1.1@86.352,63.276 ; R1.2 SW1.1@86.352,63.276
RST_SCREEN: R12.2 SW2.1 U1.10 | length 68.5
  Top Layer w0.508: SW2.1@15.95,75.946 19.55,75.946 R12.2 22.845,74.945 24.369,73.421 24.369,73.406 46.482,73.406 47.371,72.517 47.371,58.293 v1(49.403,56.261) ; v1(57.023,56.261) 59.436,56.261 62.992,59.817 62.992,62.706 U1.10
  Bottom Layer w0.508: v1(49.403,56.261) v1(57.023,56.261)
SWDCLK: J3.4 U1.39 | length 38.3
  Top Layer w0.508: U1.39 v1(79.629,71.628) ; J3.4 v1(90.17,52.451)
  Bottom Layer w0.508: v1(79.629,71.628) 88.646,71.628 90.17,70.104 v1(90.17,52.451)
SWDIO: J3.2 U1.37 | length 36.1
  Top Layer w0.508: U1.37 v1(79.629,70.358) ; J3.2 v1(87.376,49.911)
  Bottom Layer w0.508: v1(79.629,70.358) 87.63,70.358 88.646,69.342 88.646,51.181 v1(87.376,49.911)
VBAT: C4.2 J1.2 R8.2 U1.23 U2.10 | length 126
  Top Layer w0.508: J1.2 26.813,3.667 27.305,3.175 45.339,3.175 47.752,5.588 v1(47.752,44.196) ; R8.2 57.476,65.151 v1(58.547,65.151) ; 58.332,42.433 58.332,44.879 58.166,45.045 58.103,44.982 56.793,44.982 v1(56.769,44.958) 56.769,47.708 57.067,48.006 67.056,48.006 v1(72.009,52.959) ; v1(72.009,57.912) 72.635,58.538 U1.23
  Bottom Layer w0.508: v1(47.752,44.196) 56.578,44.196 56.769,44.386 v1(56.769,44.958) 56.769,49.911 58.547,51.689 58.547,62.738 v1(58.547,65.151) ; v1(72.009,52.959) v1(72.009,57.912)
VBAT_AN: C5.2 R8.1 R10.2 U1.7 | length 12.3
  Top Layer w0.508: R8.1 R10.2 57.416,61.408 59.931,61.408 C5.2 59.944,65.151 61.341,66.548 U1.7
VBUS: C3.2 J2.1 J3.5 U2.1 | length 90.2
  Top Layer w0.508: 53.682,42.433 53.682,45.006 C3.2 53.761,45.085 54.864,45.085 55.6,45.821 J2.1 ; 73.406,42.545 v1(73.406,46.863) 73.406,49.149 81.407,57.15 86.995,57.15 87.503,56.642 87.503,55.626 85.598,53.721 J3.5
  Bottom Layer w0.508: v1(53.721,43.053) 53.721,35.35 54.273,34.798 61.341,34.798 v1(73.406,46.863)
VDD_nRF: C8.2 C10.2 J3.1 J4.15 J4.16 L1.1 L2.2 R1.1 R9.1 R11.1 R12.1 U1.19 | length 239.3
  Top Layer w0.19: J4.15 69.75,31.396 70.25,31.896 ; J4.16 70.25,31.896 ; C8.2 74.803,36.449 70.25,31.896
  Top Layer w0.508: R12.1 v1(45.466,75.946) ; v1(46.863,50.546) 49.53,47.879 49.53,33.699 49.828,33.401 52.578,33.401 53.721,34.544 R11.1 53.729,36.3 60.191,36.3 60.198,36.307 R9.1 67.137,36.307 71.216,40.386 ; U1.19 70.095,57.159 70.906,56.348 L2.2 77.938,56.348 ; C8.2 75.525,37.806 78.105,40.386 ; L1.1 79.215,6.52 78.79,6.945 C10.2 77.514,6.945 77.216,7.243 77.216,10.541 78.994,12.319 78.994,20.447 82.55,24.003 82.55,37.465 79.629,40.386 ; J3.1 87.249,48.641 87.249,44.831 82.804,40.386 79.629,40.386 ; R1.1 89.154,60.325 88.011,59.182 80.772,59.182 77.938,56.348 ; 71.216,40.386 71.216,49.626 77.938,56.348 ; 71.216,40.386 78.105,40.386 ; 78.105,40.386 79.629,40.386
  Bottom Layer w0.508: v1(45.466,75.946) 47.625,73.787 47.625,51.308 v1(46.863,50.546)
pads on no net: J1.0 J2.2 J2.3 J2.4 J2.M J3.0 J3.6 J3.7 J3.8 J3.9 J3.10 J4.1 J4.6 J4.7 U1.1 U1.2 U1.3 U1.4 U1.6 U1.8 U1.9 U1.12 U1.14 U1.15 U1.17 U1.18 U1.33 U1.35 U1.40 U1.41 U1.42 U1.43 U2.6

## Polygon pours and split planes (outlines as drawn)
GND on Top Layer "Top Layer-GND" (solid, pour order 8): 0,0 0,78.5 91,78.5 91,0
GND on Bottom Layer "Bottom Layer-GND" (solid, pour order 10): 0,0 0,78.5 91,78.5 91,0

## Silkscreen, mask and mechanical layers (free items; w line width, h text height)
Top Overlay:
  lines w0.254: 0,0 91,0 91,78.5 0,78.5 0,0 ; 4,6.75 4,71.75 46,71.75 46,6.75 4,6.75 ; 61,4 76,4 76,11 61,11 61,4

## Dimensions
16,78.121 to 0,78.486 on Mechanical 15
88,3 to 0,0 on Mechanical 15
0,0 to 3,3 on Mechanical 15
3,3 to 0,0 on Mechanical 15
3,75.5 to 0,78.486 on Mechanical 15
3,75.5 to 0,78.486 on Mechanical 15
61,11 to 59,13.002 on Mechanical 15
61,11 to 59,13.002 on Mechanical 15
76,11 to 78,13.002 on Mechanical 15

## Text inside footprints (layer, text, board x,y; h text height)
U1: Top Overlay "2G4M08S1C" at 65.433,69.612 h0.8; Top Overlay "E73" at 67.592,71.644 h0.8